# EAGLE board practice 2.1 (EAGLE 7.2.0)

Size 100 x 80 mm. Coordinates in mm from the lower left corner, seen from the top.
Outline: 0,0 100,0 100,80 0,80 0,0
Copper layers (1*16): Top 0.035mm / dielectric 1.5mm / Bottom 0.035mm
Design rules "default": minimum track width 10mil, minimum drill 24mil, track to track 8mil, track to pad 8mil, pad to pad 8mil, via to via 8mil, smd to smd 8mil, copper to edge 40mil, drill to drill 8mil, minimum pad ring 10mil, minimum via ring 8mil, stop-mask expansion 4mil, vias tented up to drill 0mil, thermal gap 10mil

## Footprints (pad centres in the part's own frame; a part is rotated, then mirrored left to right if it is on the bottom)
E3,5-10 = drill 0.813 pad 1.6: + -1.778,0 | drill 0.813 pad 1.6 octagon: - 1.778,0
DO41-10 = drill 1.118: A 5.08,0; C -5.08,0
1X02 = drill 1.016 long: 1 -1.27,0; 2 1.27,0
0207/10 = drill 0.813 octagon: 1 -5.08,0; 2 5.08,0

## Placement (x,y rotation side)
C1  [E3,5-10]  -20.32,6.35 0 top  (outside the outline)
D1  1N4004  [DO41-10]  -19.05,22.86 0 top  (outside the outline)
JP1  INPUT_VALUE  [1X02]  -24.13,15.24 0 top  (outside the outline)
R1  [0207/10]  -19.05,27.94 0 top  (outside the outline)

## Library data of the parts
C1 R1 = rcl
D1 = diode
JP1 = pinhead

## Nets
N$1: D1.A JP1.1
N$2: C1.- JP1.2 R1.1
N$3: C1.+ D1.C

## Tracks (layer width: path | path; a pad name or v marks a point on that pad's centre or on a via)
N$1  (1 unrouted)
N$2  (2 unrouted)
N$3  (1 unrouted)